# Altium PCB PCB1.PcbDoc
Units mil, origin at the board's own origin, x right, y up, seen from the top; angles counter-clockwise.
Board outline 1390.03 x 1075.03 mil, 4 copper layers (Top Layer, Layer 1, Layer 2, Bottom Layer), stack 23.756 mil thick; 24 components, 18 nets, 83 pads, 25 vias.
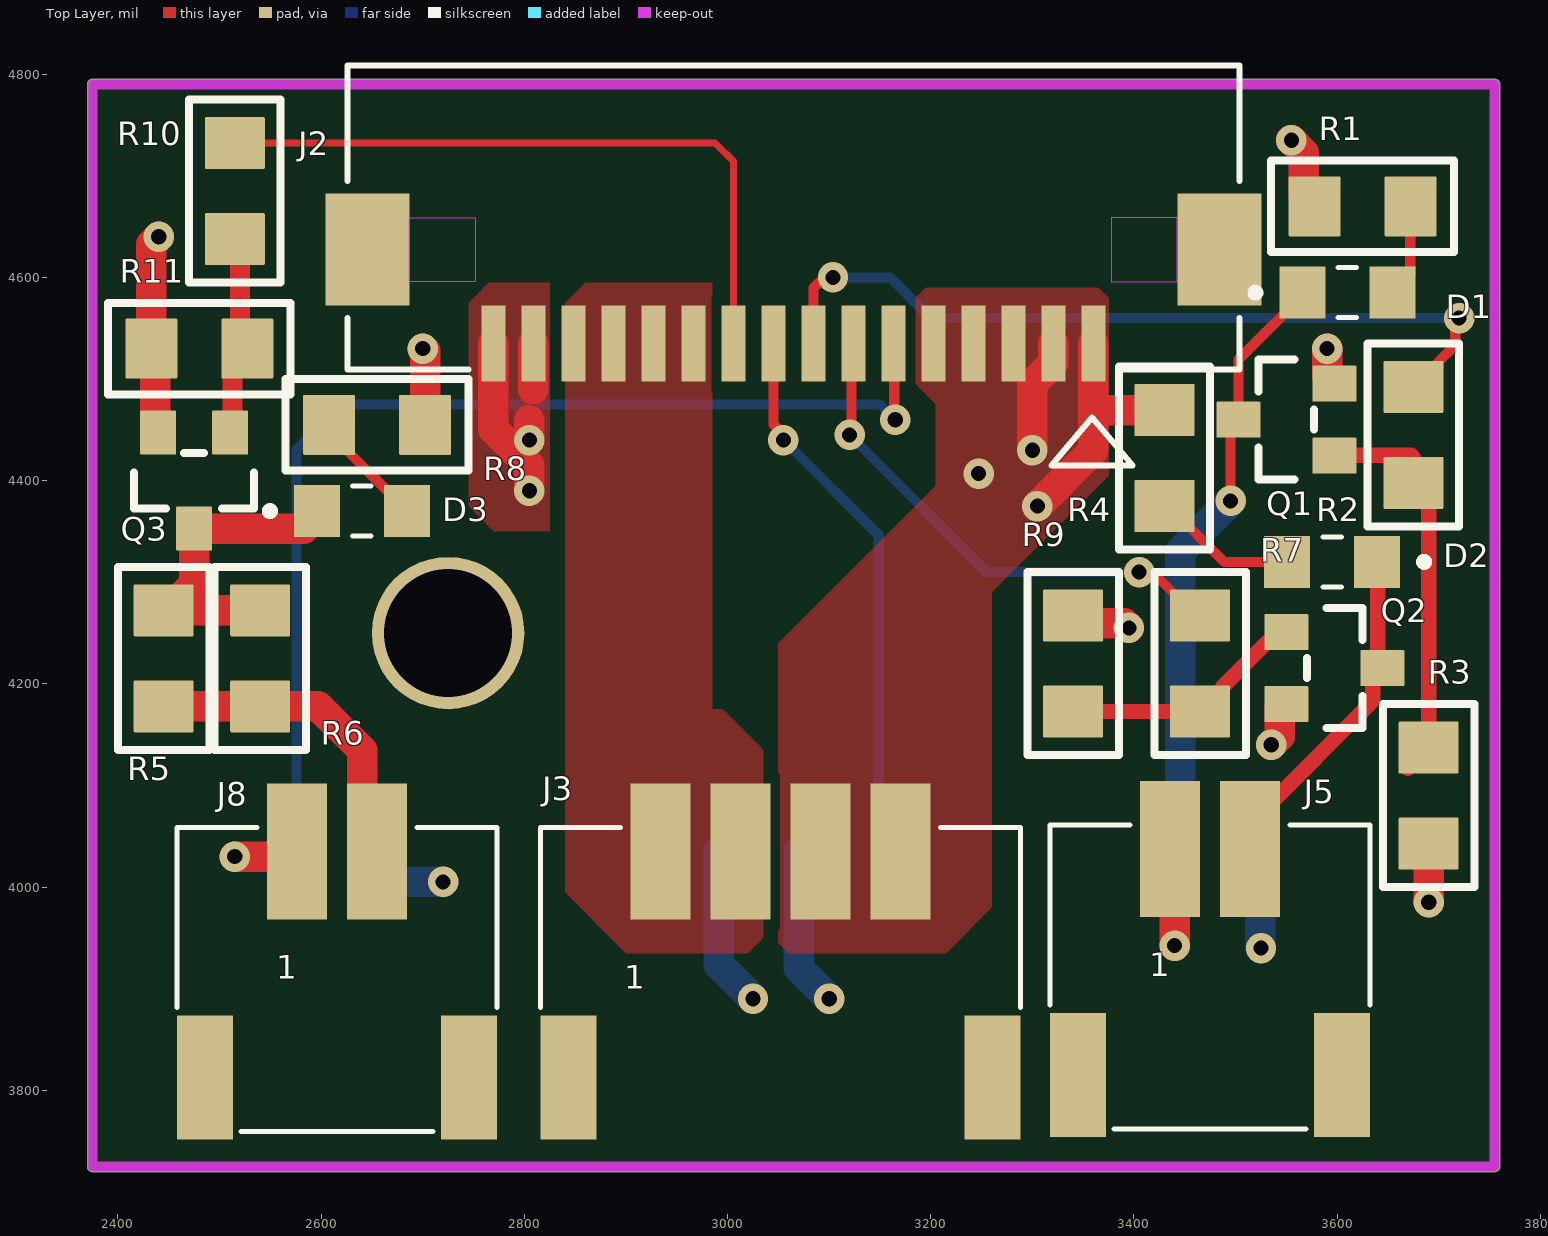
[diagram p0: Top Layer view]
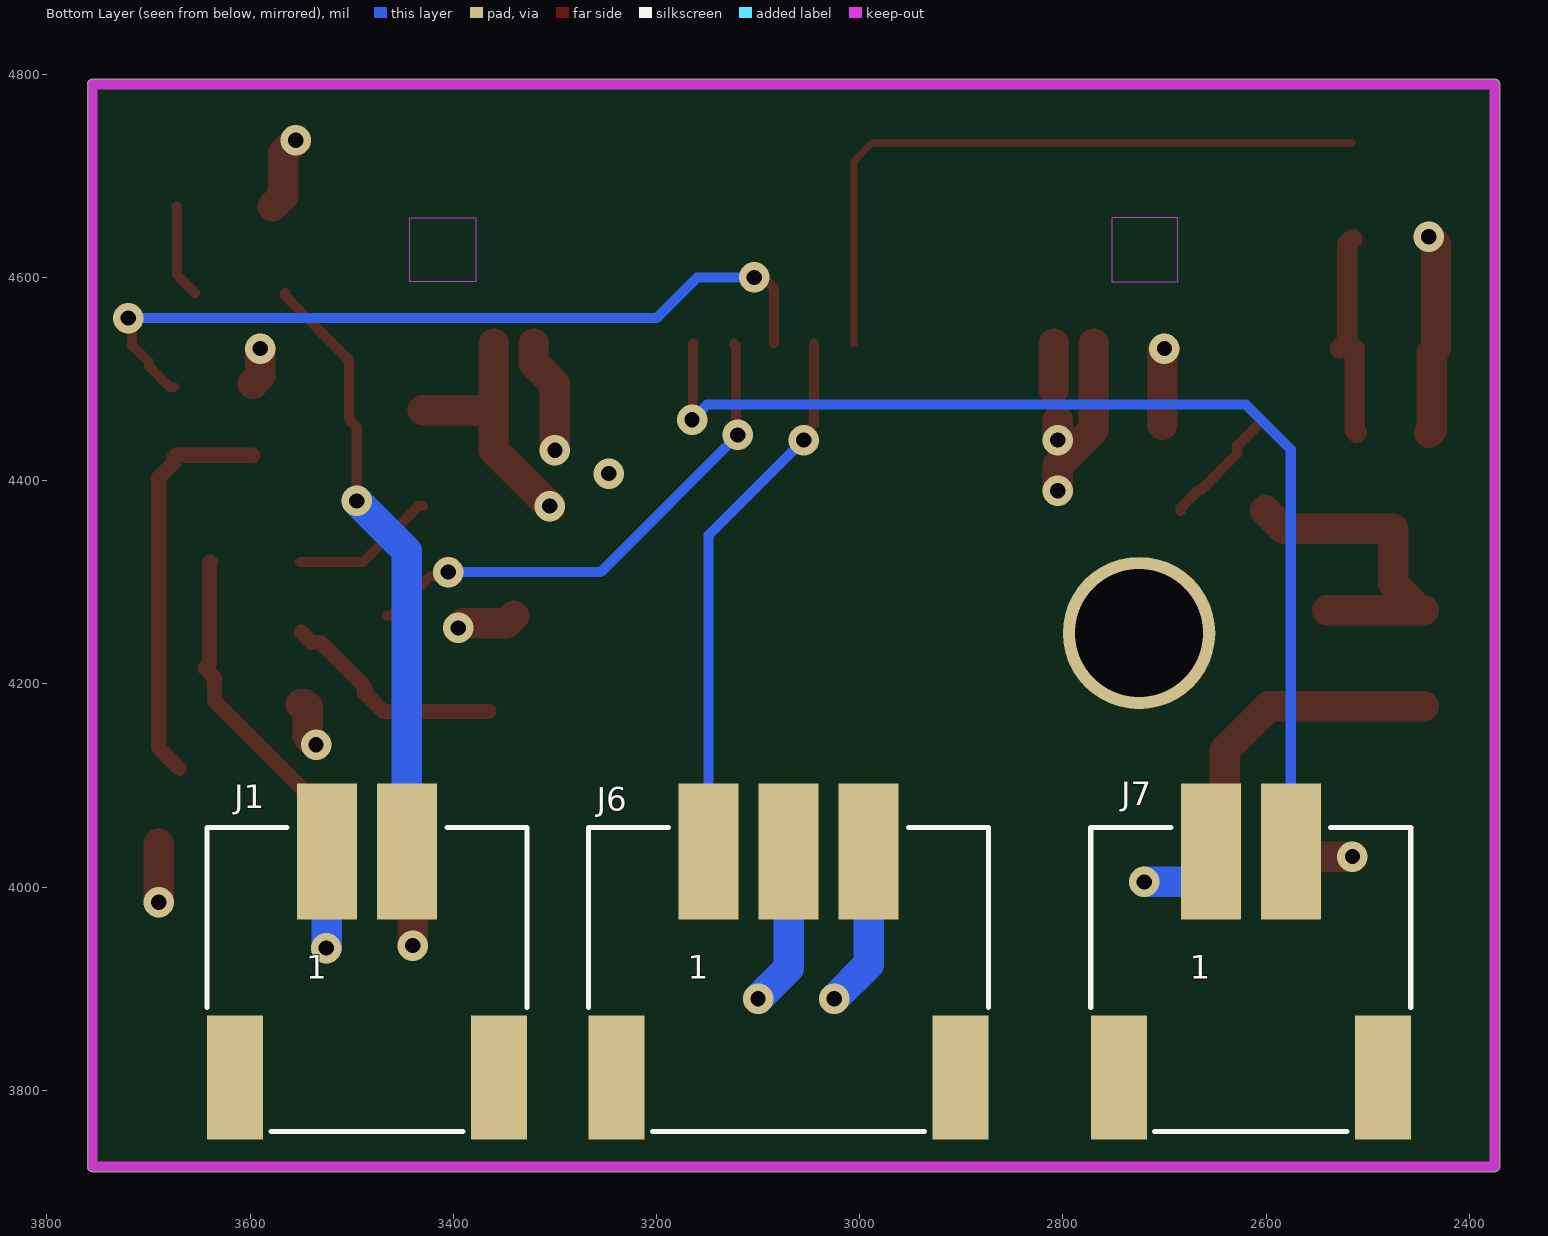
[diagram p1: Bottom Layer view, seen from below]
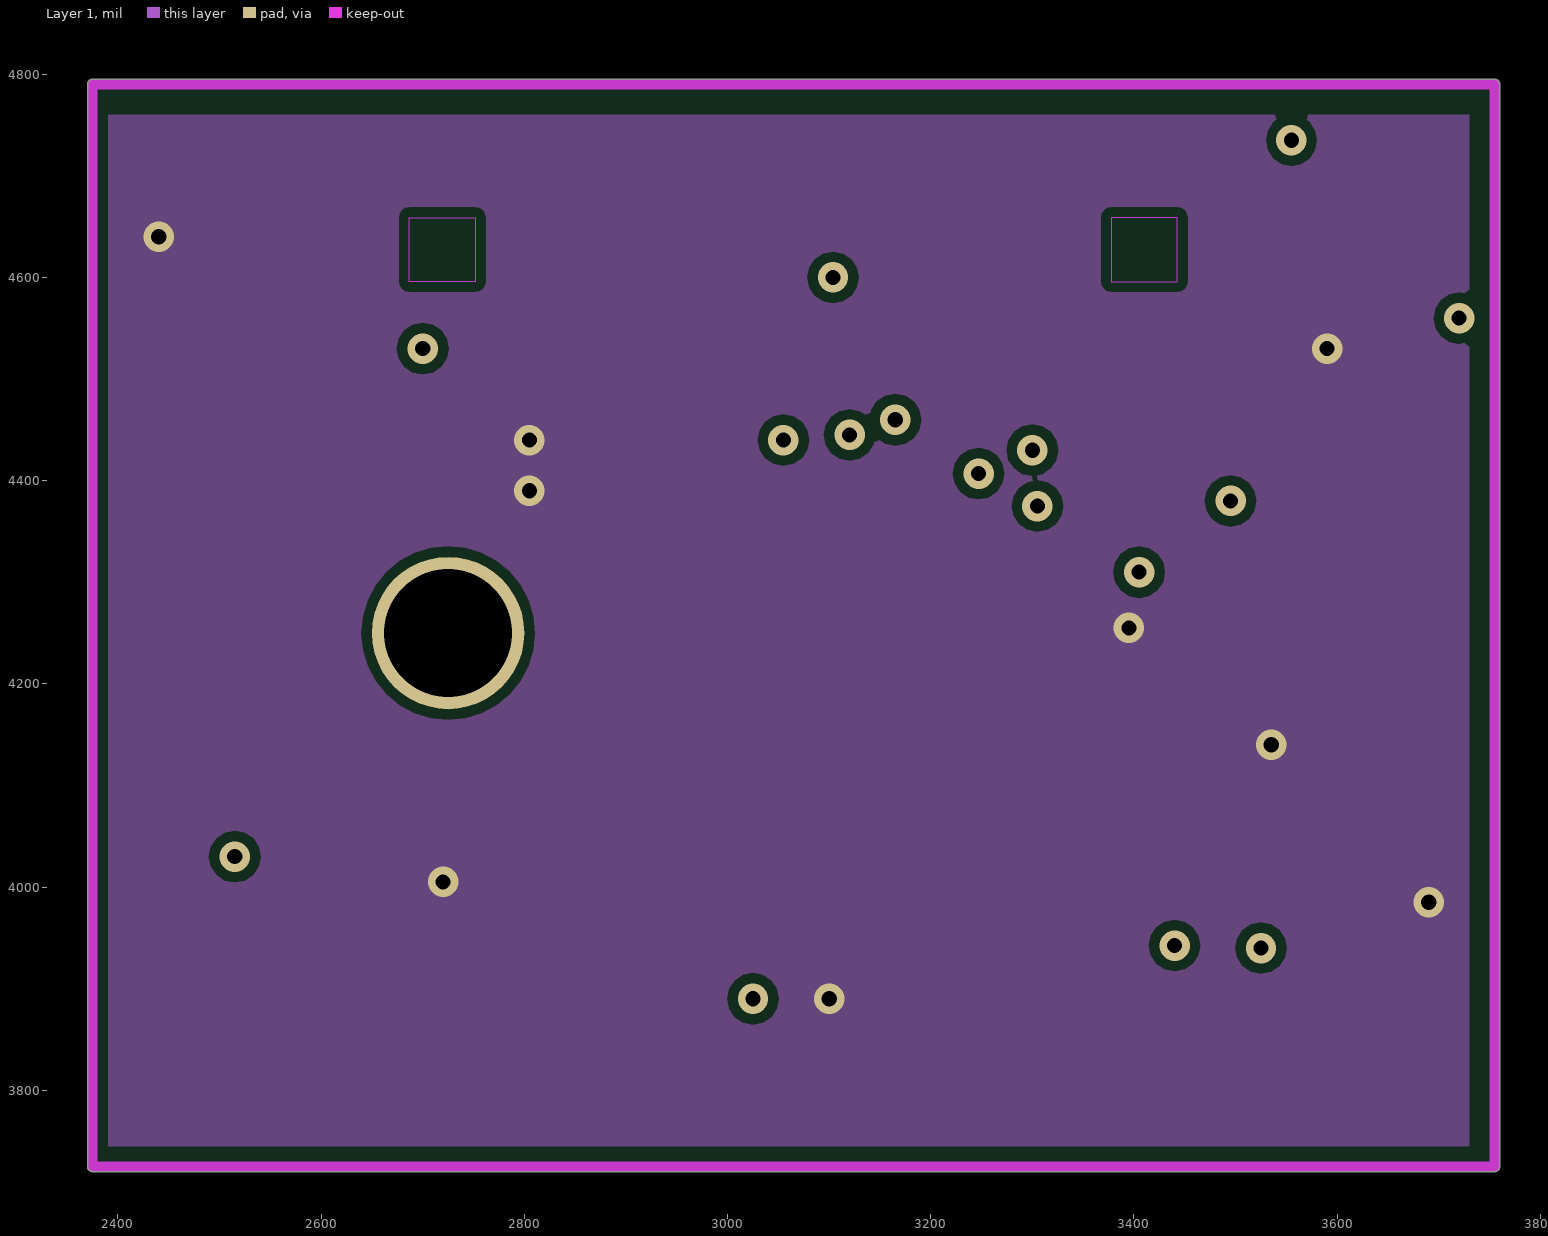
[diagram p2: Layer 1]
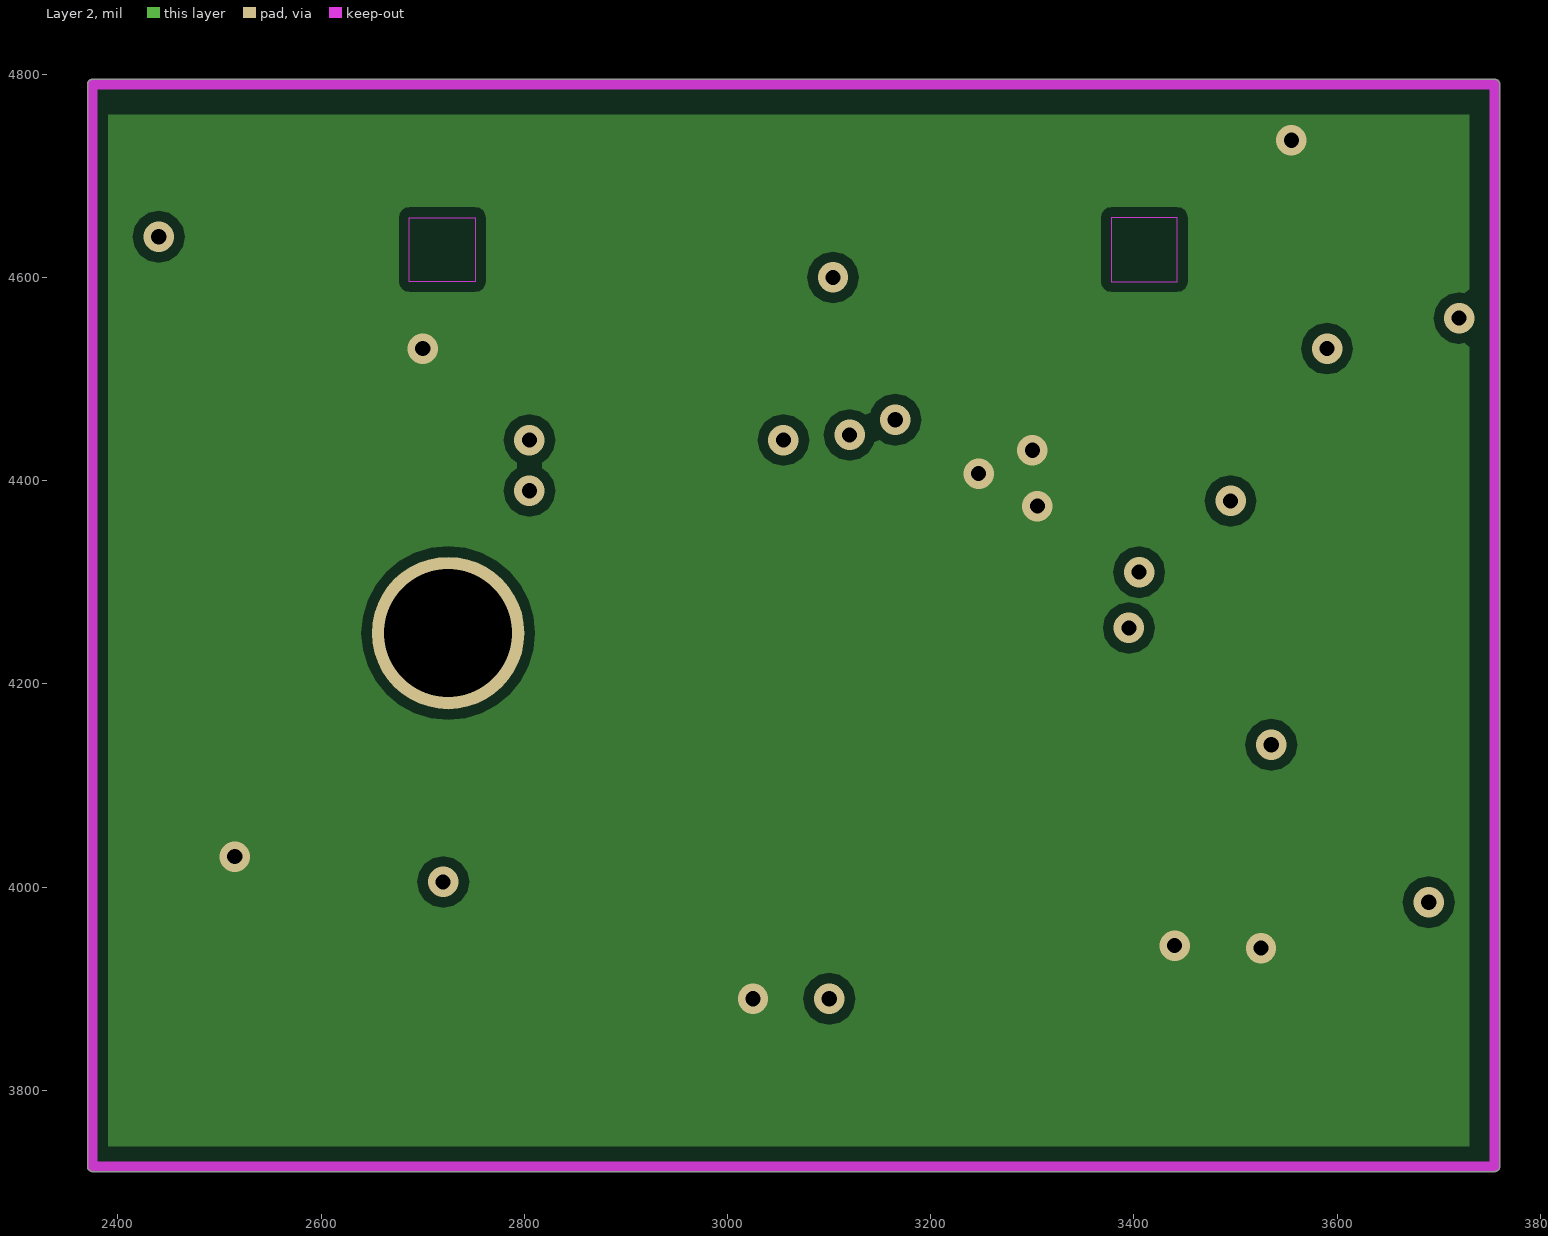
[diagram p3: Layer 2]
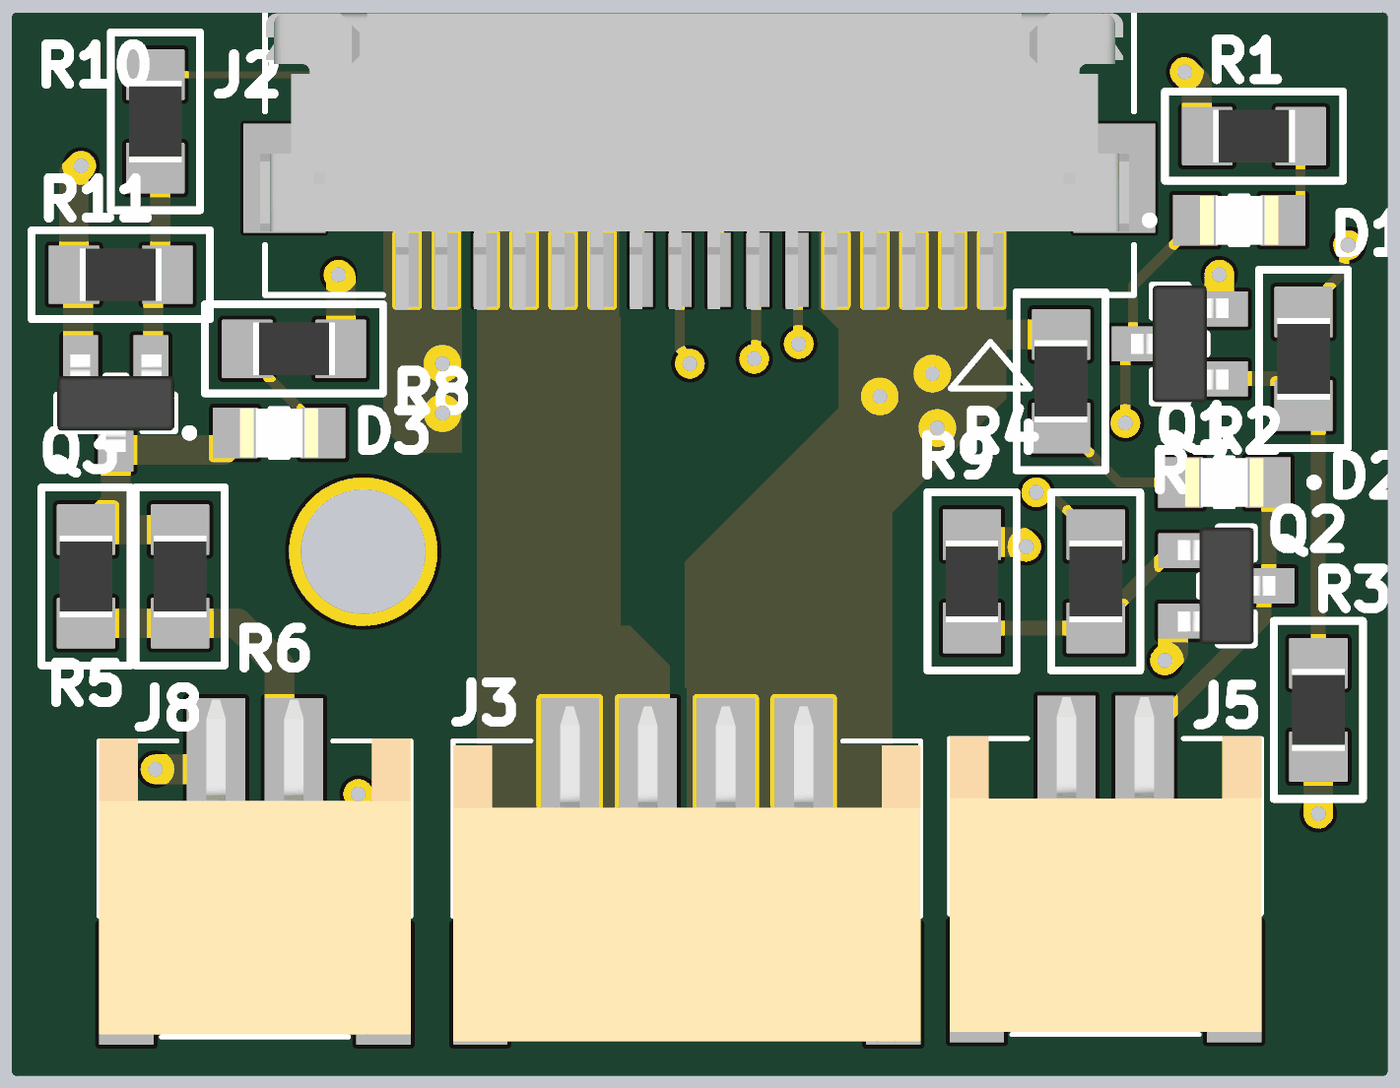
[diagram p4: 3D render of the assembled board from above, using the file's embedded part models]
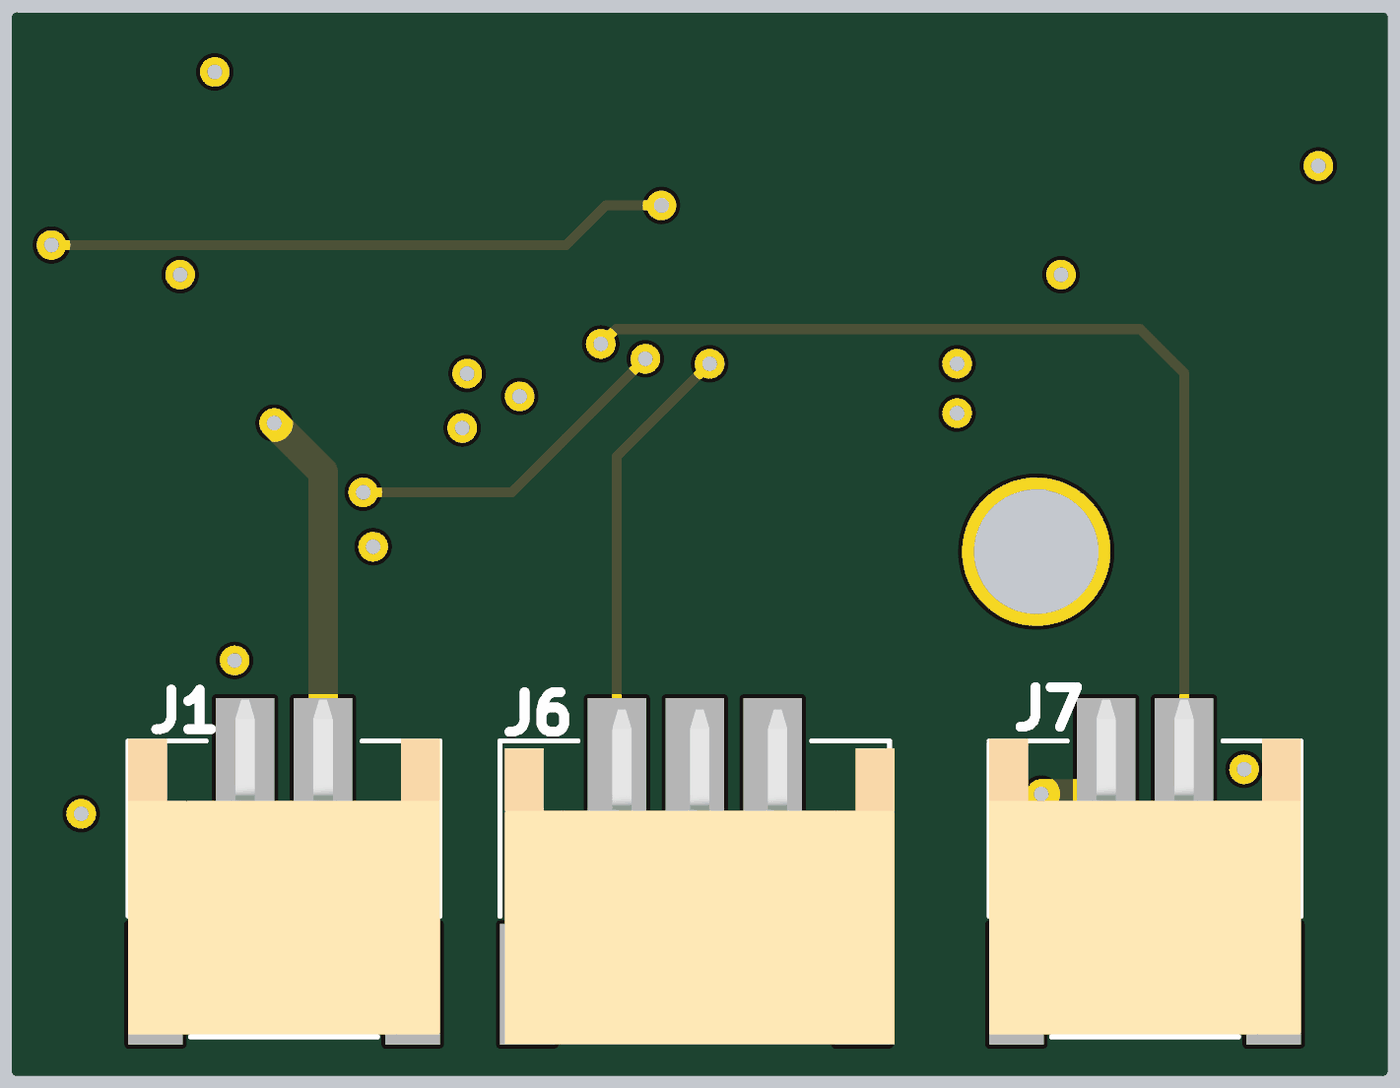
[diagram p5: 3D render of the assembled board from below, using the file's embedded part models]

## Layer stack, top to bottom
Top Solder: solder mask 0.4, Solder Resist, Dk 3.5
Top Layer: signal copper 1.4
Dielectric 2: prepreg 2.8, PP-006, Dk 4.1
Layer 1: signal copper 1.378
Dielectric 3: prepreg 2.8, PP-006, Dk 4.1
Layer 2: signal copper 1.378
Dielectric 1: dielectric 12.6, FR-4, Dk 4.8
Bottom Layer: signal copper 1.4
Bottom Solder: solder mask 0.4, Solder Resist, Dk 3.5

## Board outline
2376.02,3720.09 cw(c2375,3725) 2369.99,3725 2369.99,4790 cw(c2375,4790) 2375,4795.02 3752.95,4795.02 cw(c3752.95,4790) 3753.98,4794.91 cw(c3755,4790) 3760.01,4790 3760.01,3725 cw(c3755,3725) 3755,3719.99 2377.05,3719.99 cw(c2377.05,3725)

## Design rules (kind name [scope] priority, off if disabled: settings)
Clearance [All] p1: gap=10 ignorepadtopadclearanceinfootprint=FALSE except(0: Arc-Hole Track-Hole SMDPad-Hole THPad-Hole Via-Hole Fill-Hole Poly-Hole Region-Hole Text-Hole; 7: SMDPad-SMDPad)
PolygonConnect [All] p1: connectstyle=Direct reliefconductorwidth=10 reliefentries=4 polygonreliefangle="90 Angle" airgapwidth=10
RoutingVias [All] p1: holewidth=15 width=30 viastyle="Through Hole" minholewidth=12 minwidth=24 maxholewidth=28 maxwidth=50
SolderMaskExpansion [All] p1: expansion=4 istentingtop=FALSE
Width [All] p1: maxlimit=50 minlimit=7 preferedwidth=10 midlayer1_minwidth=10 midlayer1_maxwidth=10 midlayer2_minwidth=10 midlayer2_maxwidth=10 minimp=50.000000 maximp=50.000000 favimp=50.000000
30 further rules are at their usual default settings.

## Components (designator, comment, footprint, x,y, rotation, side; value= is the part's Value field where it differs from the comment)
D1 "KP-2012SRC-PRV" "0805 LED" 3610,4585 r0 top
D2 "KP-2012SRC-PRV" "0805 LED" 3595,4320 r180 top
D3 "KP-2012SRC-PRV" "0805 LED" 2640,4370 r0 top
J1 "620102131822" 620102131822 3485,4035 r180 bottom
J2 "522071633" CON_522071633_MOL 3064.72,4659.02 r180 top
J3 "620104131822" 620104131822 3051.89,4035 r0 top
J5 "620102131822" 620102131822 3474.92,4037.44 r0 top
J6 "620103131822" 620103131822 3070,4035 r180 bottom
J7 "620102131822" 620102131822 2615.08,4035 r180 bottom
J8 "620102131822" 620102131822 2615.63,4035 r0 top
Q1 "SingleNPN_B1E2C3" SOT23-3_MMBT3904,215 3550,4460 r180 top value=MMBT3904
Q2 "SingleNPN_B1E2C3" SOT23-3_MMBT3904,215 3597.24,4215.43 r0 top value=MMBT3904
Q3 "SingleNPN_B1E2C3" SOT23-3_MMBT3904,215 2475,4400 r270 top value=MMBT3904
R1 "StandardResistor" R_0805_GEN_0.70H 3625,4670 r180 top value=2K
R2 "StandardResistor" R_0805_GEN_0.70H 3675,4445 r270 top value=33R
R3 "StandardResistor" R_0805_GEN_0.70H 3690,4090 r90 top value=3.3K
R4 "StandardResistor" R_0805_GEN_0.70H 3430,4422.24 r90 top value=2K
R5 "StandardResistor" R_0805_GEN_0.70H 2445,4225 r270 top value=22K
R6 "StandardResistor" R_0805_GEN_0.70H 2540,4225 r270 top value=22K
R7 "StandardResistor" R_0805_GEN_0.70H 3465,4220 r270 top value=33R
R8 "StandardResistor" R_0805_GEN_0.70H 2655,4455 r0 top value=2K
R9 "StandardResistor" R_0805_GEN_0.70H 3340,4220 r270 top value=3.3K
R10 "StandardResistor" R_0805_GEN_0.70H 2515,4685 r270 top value=33R
R11 "StandardResistor" R_0805_GEN_0.70H 2480,4530 r0 top value=3.3K

## Footprints (in the part's own frame and the unit in brackets; to place one, negate y for a bottom-side part, rotate by r counter-clockwise, add the part's x,y. Pads: shape width x height; smd on the part's side, far side on the other; paste and mask are expansions set on the pad)
"0805 LED" [mm]
  rect 1.15x1.3 smd: A(1.125,0) K(-1.125,0)
  silkscreen extent -2.4,-0.63 0.23,0.63, body extent -1,-0.62 1,0.62, height 0.73
620102131822 [mm]
  rect 1.5x3.4 smd: 1(-1,0) 2(1,0)
  rect 1.4x3.1 smd: Z1(-3.3,-5.65) Z2(3.3,-5.65)
  silkscreen extent -4,-7 4,0.6, body extent -4,-6.94 4,1.66, height 5.54
620103131822 [mm]
  rect 1.5x3.4 smd: 1(-2,0) 2(0,0) 3(2,0)
  rect 1.4x3.1 smd: Z1(-4.3,-5.65) Z2(4.3,-5.65)
  silkscreen extent -5,-7 5,0.6, body extent -4.87,-7.19 5.13,1.41, height 5.92
620104131822 [mm]
  rect 1.5x3.4 smd: 1(-3,0) 2(-1,0) 3(1,0) 4(3,0)
  rect 1.4x3.1 smd: Z1(-5.3,-5.65) Z2(5.3,-5.65)
  silkscreen extent -6,-3.9 6,0.6, body extent -6,-7.11 6,1.49, height 5.54
CON_522071633_MOL [mm]
  rect 0.6x1.9 smd paste+0 mask+0.076: 1(-7.5,3.15) 2(-6.5,3.15) 3(-5.5,3.15) 4(-4.5,3.15) 5(-3.5,3.15) 6(-2.5,3.15) 7(-1.5,3.15) 8(-0.5,3.15) 9(0.5,3.15) 10(1.5,3.15) 11(2.5,3.15) 12(3.5,3.15) 13(4.5,3.15) 14(5.5,3.15) 15(6.5,3.15) 16(7.5,3.15)
  rect 2.1x2.8 smd paste+0 mask+0.076: P1(-10.65,0.8) P2(10.65,0.8)
  Keep-Out Layer region: -7.95,0 -7.95,1.6 -9.6,1.6 -9.6,0
  Keep-Out Layer region: 7.95,0 7.95,1.6 9.6,1.6 9.6,0
  silkscreen extent -11.15,-3.8 11.15,6.2, body extent -11.02,-3.44 11.28,4.16, height 2.75
R_0805_GEN_0.70H [mm] "ADDED BY: HasanA, CHECKED BY: YasinY, APPROVAL STATUS: NO"
  rrect5% 1.3x1.5 smd: 1(-1.2,0) 2(1.2,0)
  silkscreen extent -2.29,-1.14 2.29,1.14, body extent -1.05,-0.67 1.05,0.67, height 0.6
SOT23-3_MMBT3904,215 [mm] "ADDED BY: HasanA, CHECKED BY: ???, APPROVAL STATUS: NO"
  rrect5% 1.1x0.9 smd: 1(-1.2,0.9) 2(-1.2,-0.9) 3(1.2,0)
  silkscreen extent -0.69,-1.5 0.7,1.5, body extent -1.25,-1.5 1.25,1.5, height 1.1

## Part data
D1 D2 D3: "KP-2012SRC-PRV Red LED, 640 nm 2012 (0805), Rectangle Lens SMD package", Case/Package=2012, Color=Red, Forward Current=20mA, Forward Voltage=1.85V, Lens Color=Clear, Manufacturer=Kingbright, Max Operating Temperature=85°C, Min Operating Temperature=-40°C, Supplier Part Number 1=1318244, Category=LEDs, ComponentLink1Description=https://datasheet.ciiva.com/14176/kp2012src-prv-eng-tds-14176962.pdf?src-supplier=Distrelec, ComponentLink1URL=https://datasheet.ciiva.com/14176/kp2012src-prv-eng-tds-14176962.pdf?src-supplier=Distrelec, ComponentLink2Description=https://datasheet.ciiva.com/11773/0900766b8032fa8d-11773524.pdf?src-supplier=RSComponents, ComponentLink2URL=https://datasheet.ciiva.com/11773/0900766b8032fa8d-11773524.pdf?src-supplier=RSComponents, ComponentLink3Description=https://datasheet.ciiva.com/14634/0900766b8032fa8d-14634746.pdf?src-supplier=Allied+Electronics, ComponentLink3URL=https://datasheet.ciiva.com/14634/0900766b8032fa8d-14634746.pdf?src-supplier=Allied+Electronics, ComponentLink4Description=https://datasheet.ciiva.com/29281/180105-da-01-en-led-0805-typ-kp-2012src-prv-29281248.pdf?src-supplier=Conrad, ComponentLink4URL=https://datasheet.ciiva.com/29281/180105-da-01-en-led-0805-typ-kp-2012src-prv-29281248.pdf?src-supplier=Conrad, Dominant Wavelength=640nm, Lens Style=Rectangular,Diffused,Colorless, Luminous Intensity=100mcd, Manufacturer Part Number=KP-2012SRC-PRV, Mount="Surface Mount", Number of LEDs=1, Number of Pins=2, Packaging="Cut Tape", Pricing 1="5=0,12900, 50=0,10200, 100=0,09830, 500=0,08370, 1000=0,07290 (EUR)", Radiation Hardening=No, Reach SVHC Compliant=Yes, RoHS=Yes, RoHS Compliant=Yes, Supplier 1=Farnell, Viewing Angle=120°, Wavelength=640nm
J1 J5 J7 J8: "Connector Header Surface Mount, Right Angle 2 position 0.079 _2.00mm_", Package=None, Availability=Unavailable, MF="Wurth Electronics", MP=620102131822, Price=None, SnapEDA_Link=https://www.snapeda.com/parts/620102131822/Wurth%20Electronics%20Inc./view-part/424042/?ref=snap
J2: "No Description Available", Mfr_Name="Molex Connector Corporation", RefDes=RefDes, Type=Type
J3: "<b> WR-WTB 2.00mm SMT Male Horizontal Shrouded Header, 4 Pins</b>=>Code : Con_WTB_2.00_PCB_SMT_620104131822 <br><a href=\"http://katalog.we-online.de/media/thumbs2/eican/thb_Con_WTB_2.00_PCB_SMT_6201xx131822_pf2.jpg\" title=\"Enlarge picture\"> <img src=\"http://katalog.we-online.de/media/thumbs2/eican/thb_Con_WTB_2.00_PCB_SMT_6201xx131822_pf2.jpg\"  width=\"320\"></a><p> Details see: <a href=\"http://katalog.we-online.de/en/em/WTB_2_00_SMT_MALE_HORIZONTAL_SHROUDED_HEADER_6201XX131822\">http://katalog.we-online.de/en/em/WTB_2_00_SMT_MALE_HORIZONTAL_SHROUDED_HEADER_6201XX131822</a><p> Created 2014-06-05, Karrer Zheng<br> 2014 (C) WÃ¼rth Elektronik", Package=None, Availability=Unavailable, MP=620104131822, Price=None
J6: "Connector Header Surface Mount, Right Angle 3 position 0.079 (2.00mm)", Package=None, Availability=Warning, MF="Wurth Electronics", Mouser-Purchase-URL=https://snapeda.com/shop?store=Mouser&id=1330579, MP=620103131822, Price=None, SnapEDA_Link=https://www.snapeda.com/parts/620103131822/Wurth%20Electronics%20Inc./view-part/1330579/?ref=snap
Q1 Q2 Q3: library part NPN_40V-200mA_#1, "TRA_NPN_SING_40V_200mA_VSAT300mV_SOT23-3", Current=200mA, Manufacturer#1=Nexperia, Manufacturer#1 PN=MMBT3904,215, Manufacturer#2=Diodes, Manufacturer#2 PN=MMBT3904-7-F, Max Reflow Temp=260, Package=SOT23-3, Power Rating=X, Temp# Operating=-65°C/+150°C, Voltage=40V, Added by=HasanA, Checked by=EserC, ComponentLink1Description="Resource Folder", ComponentLink1URL=C:\BNA_Repo\HW_Lib\trunk\ComponentLibrary\Resources\Transistors\Q00012, Cost=0.10, Failure in Time="0.44@[60%CL; 55°C; 0.7eV]", Features="Single NPN signal BJT", FireANTs Code=Q00012, Grade Level=Industrial, Height=1.10, Identifier=NPN_40V-200mA_#1, Lead Status=Pb-Free, Location=4D3, Max Reflow Duration=30, Mounting Type=SMD, MSL=1, Part Status=Active, Placement Area=14.00, Similar Part="SST3904HZGT116; PMBT3904,235", Temp# Storage=-65°C/+150°C, Tolerance=X, Weight=7.48mg
R1 R4 R8: library part STD_2K_#7, "RES_STD_2K_0.125W_0.1%_25ppm_0805", Current=X, Manufacturer#1=Panasonic, Manufacturer#1 PN=ERA-6AEB202V, Manufacturer#2=Susumu, Manufacturer#2 PN=RG2012P-202-B-T5, Max Reflow Temp=260, Package=0805, Power Rating=125mW, Temp# Operating=-55°C/+155°C, Temp# Storage=N/A, Tolerance=0.1%, Voltage=100V, Added by=İlhanT, Checked by=YasinY, ComponentLink1Description="Resource Folder", ComponentLink1URL=C:\FireANTs_Repo\HW_Lib\trunk\ComponentLibrary\Resources\Resistors\R00087, Cost=0.31, Failure in Time=N/A, Features=AEC-Q200, FireANTs Code=R00087, Grade Level=Automotive, Height=0.70, Identifier=STD_2K_#7, Lead Status=Pb-Free, Location=2C22, Max Reflow Duration=10, Mounting Type=SMD, MSL=1, Part Status=Active, Placement Area=10.45, Similar Part=ERA-6ARB202V, Weight=5.5mg
R2 R5 R6 R7 R10: library part STD_33R_#3, "RES_STD_33R_0.125W_1%_100ppm_0805", Current=X, Manufacturer#1=Yageo, Manufacturer#1 PN=AC0805FR-0733RL, Manufacturer#2=Panasonic, Manufacturer#2 PN=ERJ-6ENF33R0V, Max Reflow Temp=260, Package=0805, Power Rating=125mW, Temp# Operating=-55°C/+155°C, Temp# Storage=N/A, Tolerance=1%, Voltage=150V, Added by=HasanA, Checked by=YasinY, ComponentLink1Description="Resource Folder", ComponentLink1URL=C:\FireANTs_Repo\HW_Lib\trunk\ComponentLibrary\Resources\Resistors\R00051, Cost=0.10, Failure in Time=N/A, Features=AEC-Q200, FireANTs Code=R00051, Grade Level=Automotive, Height=0.70, Identifier=STD_33R_#3, Lead Status=Pb-Free, Location=2C13, Max Reflow Duration=10, Mounting Type=SMD, MSL=1, Part Status=Active, Placement Area=10.45, Similar Part=N/A, Weight=5.5mg
R3 R9 R11: library part STD_3.3K_#3, "RES_STD_3.3K_0.125W_1%_100ppm_0805", Current=X, Manufacturer#1=Yageo, Manufacturer#1 PN=AC0805FR-073K3L, Manufacturer#2=Panasonic, Manufacturer#2 PN=ERJ-6ENF3301V, Max Reflow Temp=260, Package=0805, Power Rating=125mW, Temp# Operating=-55°C/+155°C, Temp# Storage=N/A, Tolerance=1%, Voltage=150V, Added by=HasanA, Checked by=YasinY, ComponentLink1Description="Resource Folder", ComponentLink1URL=C:\FireANTs_Repo\HW_Lib\trunk\ComponentLibrary\Resources\Resistors\R00131, Cost=0.10, Failure in Time=N/A, Features=AEC-Q200, FireANTs Code=R00131, Grade Level=Automotive, Height=0.70, Identifier=STD_3.3K_#3, Lead Status=Pb-Free, Location=2G8, Max Reflow Duration=10, Mounting Type=SMD, MSL=1, Part Status=Active, Placement Area=10.45, Similar Part=N/A, Weight=5.5mg

## Free pads (board coordinates)
  round 150 hole 125.98: ""(2725,4250)

## Via types
v1: diameter 30, hole 15, Top Layer to Bottom Layer, 25 vias

## Nets (pads, with @x,y where several pads share a name; then routed paths per layer and width w, separated by ;. In a path a pad name is that pad's centre, name@x,y a point inside that pad or via, vN(x,y) a via of type N, cw(c..) or ccw(c..) an arc to the next point about the centre after c; other vN are vias at no path point)
+24VA: J1.1 J2.1 J2.2 J2.3 J2.4 J2.5 J3.3 J3.4 J5.1 J6.3 J8.1 R1.2 R4.2 R8.2 | length 931.1
  Top Layer w30: v1(2515,4030) 2571.26,4030 J8.1 ; v1(2700,4530) 2702.24,4527.76 R8.2 ; v1(3300,4430) 3300,4495.16 3320.63,4515.79 J2.2 ; v1(3305,4375) 3360,4430 3360,4469.49 ; J2.1 3360,4469.49 ; R4.2 3360,4469.49 ; J5.1 3439.92,4033.07 v1(3439.92,3942.44) ; v1(3555,4735) 3567.17,4722.83 3567.17,4680.59 R1.2
  Bottom Layer w30: J6.3 2991.26,3923.74 v1(3025,3890) ; J1.1 3524.37,3940.63 v1(3525,3940)
  other v1: 3246.98,4406.98
FAN1: J2.7 R7.1 | length 510.2
  Top Layer w10: v1(3120,4445) 3121.89,4446.89 3121.89,4533.11 J2.7 ; v1(3405,4310) 3408.83,4306.17 3422.13,4306.17 3461.06,4267.24 R7.1
  Bottom Layer w10: v1(3120,4445) 3255,4310 v1(3405,4310)
FAN2: J2.8 R2.1 | length 799.7
  Top Layer w10: J2.8 3084.41,4589.41 3095,4600 v1(3103.75,4600) ; R2.1 3678.94,4492.24 3699.53,4512.83 3699.53,4516.77 3716.17,4533.42 3716.17,4556.17 v1(3720,4560)
  Bottom Layer w10: v1(3103.75,4600) 3160,4600 3200,4560 v1(3720,4560)
GND: J2.15 J2.16 J6.2 J7.1 Q1.2 Q2.2 Q3.2 R3.1 R9.1 R11.1 | length 871.5
  Top Layer w30: Q3.2 2436.85,4449.96 2436.85,4525.91 R11.1 2432.76,4632.76 v1(2440,4640) ; J2.16 2769.45,4450.55 2805,4415 v1(2805,4390) ; v1(2805,4440) 2805,4459.61 ; 2808.82,4489.8 J2.15 ; R9.1 3347.63,4259.62 3390.38,4259.62 v1(3395,4255) ; v1(3535,4140) 3543.35,4148.35 3543.35,4177.28 3546.06,4180 Q2.2 ; v1(3590,4530) 3590,4502.68 Q1.2 ; v1(3690,3985) R3.1
  Bottom Layer w30: J7.1 2654.45,4019.53 2668.98,4005 v1(2720,4005) ; J6.2 3070,3920 v1(3100,3890)
HOTEND: J2.11 J2.12 J2.13 J2.14 J3.1 J3.2
LED: J2.10 R10.1 | length 677.4
  Top Layer w7: R10.1 2987.76,4732.24 3005.67,4714.33 J2.10
NetD1_A: D1.A R1.1 | length 92.4
  Top Layer w10: D1.A 3671.93,4602.64 3671.93,4669.69 R1.1
NetD1_K: D1.K J1.2 Q1.3 | length 599.7
  Top Layer w10: v1(3495,4380) 3495,4452.24 Q1.3 3502.76,4519.09 3565.71,4582.05 D1.K
  Bottom Layer w30: J1.2 3445.63,4330.63 v1(3495,4380)
NetD2_A: D2.A R4.1 | length 143.5
  Top Layer w10: R4.1 3433.94,4375 3488.94,4320 D2.A
NetD2_K: D2.K J5.2 Q2.3 | length 336.9
  Top Layer w15: J5.2@3524.37,4035 3524.37,4072.4 3635,4183.03 3635,4205.94 Q2.3 3640,4219.92 3640,4319.29 D2.K
NetD3_A: D3.A R8.1 | length 118
  Top Layer w10: R8.1 2628.35,4434.41 2628.35,4426.65 2664.41,4390.59 2666.65,4390.59 2684.29,4372.95 D3.A
NetD3_K: D3.K Q3.3 R5.1 R6.1 | length 319.5
  Top Layer w30: R5.1 R5.1@2448.94,4272.24 ; R6.1 R5.1@2448.94,4272.24 ; D3.K@2600.71,4370.71 2582.76,4352.76 Q3.3 2475,4298.31 R5.1@2448.94,4272.24
NetJ8_2: J8.2 R5.2 R6.2 | length 318.9
  Top Layer w30: R5.2 R6.2 2597.24,4177.76 2640.47,4134.53 2640.47,4049.53 J8.2
NetQ1_1: Q1.1 R2.2 R3.2 | length 394.6
  Top Layer w15: Q1.1 3597.6,4424.92 3672.83,4424.92 R2.2@3675,4422.76 ; R3.2@3669.41,4116.65 R3.2 3690,4402.76 R2.2@3675,4417.76
NetQ2_1: Q2.1 R7.2 R9.2 | length 221
  Top Layer w15: R9.2@3365,4172.76 3468.94,4172.76 3487.03,4190.85 3487.03,4197.03 3530.65,4240.65 3539.78,4240.65 Q2.1
NetQ3_1: Q3.1 R10.2 R11.2 | length 196.5
  Top Layer w20: Q3.1 2512.72,4449.53 R11.2@2512.72,4530 ; R10.2 2520,4632.76 2520,4537.24 R11.2
TH1: J2.6 J7.2 | length 1085.3
  Top Layer w10: J2.6 3164.07,4534.07 3164.07,4460.93 v1(3165,4460)
  Bottom Layer w10: J7.2 2575.71,4430.71 2620,4475 3150,4475 v1(3165,4460)
Z_0: J2.9 J6.1 | length 543
  Top Layer w10: J2.9 3045.04,4455.37 3055,4445.41 v1(3055,4440)
  Bottom Layer w10: v1(3055,4440) 3148.74,4346.26 J6.1
pads on no net: J1.Z1 J1.Z2 J2.P1 J2.P2 J3.Z1 J3.Z2 J5.Z1 J5.Z2 J6.Z1 J6.Z2 J7.Z1 J7.Z2 J8.Z1 J8.Z2

## Polygon pours and split planes (outlines as drawn)
+24VA on Top Layer (solid, pour order 17): 3185,4580 3185,4495 3205,4475 3205,4380 3310,4380 3345,4415 3345,4575 3330,4590 3195,4590
HOTEND on Top Layer (solid, pour order 16): 2960,3935 3020,3935 3035,3950 3035,4135 2995,4175 2975,4175 2975,4165 2945,4135 2950,4130 2950,3945
no net on Top Layer (solid, pour order 15): 2985,3935
no net on Top Layer (solid, pour order 14): 3010,3935
GND on Top Layer "Top Layer-GND" (solid, pour order 13): 2745,4575 2765,4595 2825,4595 2825,4415 2825,4350 2770,4350 2745,4375
HOTEND on Top Layer "Top Layer-HOTEND" (solid, pour order 12): 2985,4595 2985,3935 2900,3935 2840,3995 2840,4575 2860,4595
+24VA on Top Layer "Top Layer-+24VA" (solid, pour order 10): 3375,4580 3375,4404.99 3260,4289.98 3260,3980 3215,3935 3060,3935 3050,3945 3050,4240 3265,4455 3265,4575 3280,4590 3365,4590
no net on Top Layer "Top Layer-No Net" (solid, pour order 7): 3165,4585
+24VA on Layer 2 "Layer 2-+24VA" (solid, pour order 2): 2390,3745 2390,4760 3730,4760 3730,3745
GND on Layer 1 "Layer 1-GND" (solid, pour order 4): 2390,3745 2390,4760 3730,4760 3730,3745

## Keep-outs
Keep-Out Layer:
  lines w10: 2375,3725 2375,4790 3752.95,4790 ; 2377.05,3725 3755,3725 3755,4790

## Text inside footprints (layer, text, board x,y; h text height)
J1: Mechanical 13 "1" at 3544.84,3901.73 h40; Bottom Overlay "1" at 3544.84,3901.73 h40
J3: Mechanical 13 "1" at 2898.15,3891.89 h40; Top Overlay "1" at 2898.15,3891.89 h40
J5: Mechanical 13 "1" at 3415.08,3904.17 h40; Top Overlay "1" at 3415.08,3904.17 h40
J6: Mechanical 13 "1" at 3169.21,3901.73 h40; Bottom Overlay "1" at 3169.21,3901.73 h40
J7: Mechanical 13 "1" at 2674.92,3901.73 h40; Bottom Overlay "1" at 2674.92,3901.73 h40
J8: Mechanical 13 "1" at 2555.79,3901.73 h40; Top Overlay "1" at 2555.79,3901.73 h40